# Altium PCB PCB_L298n.PcbDoc
Units mm, origin at the board's own origin, x right, y up, seen from the top; angles counter-clockwise.
Board outline 45.09 x 46.1 mm, 2 copper layers (Top Layer, Bottom Layer), stack 1.57 mm thick; 21 components, 16 nets, 64 pads, 0 vias.
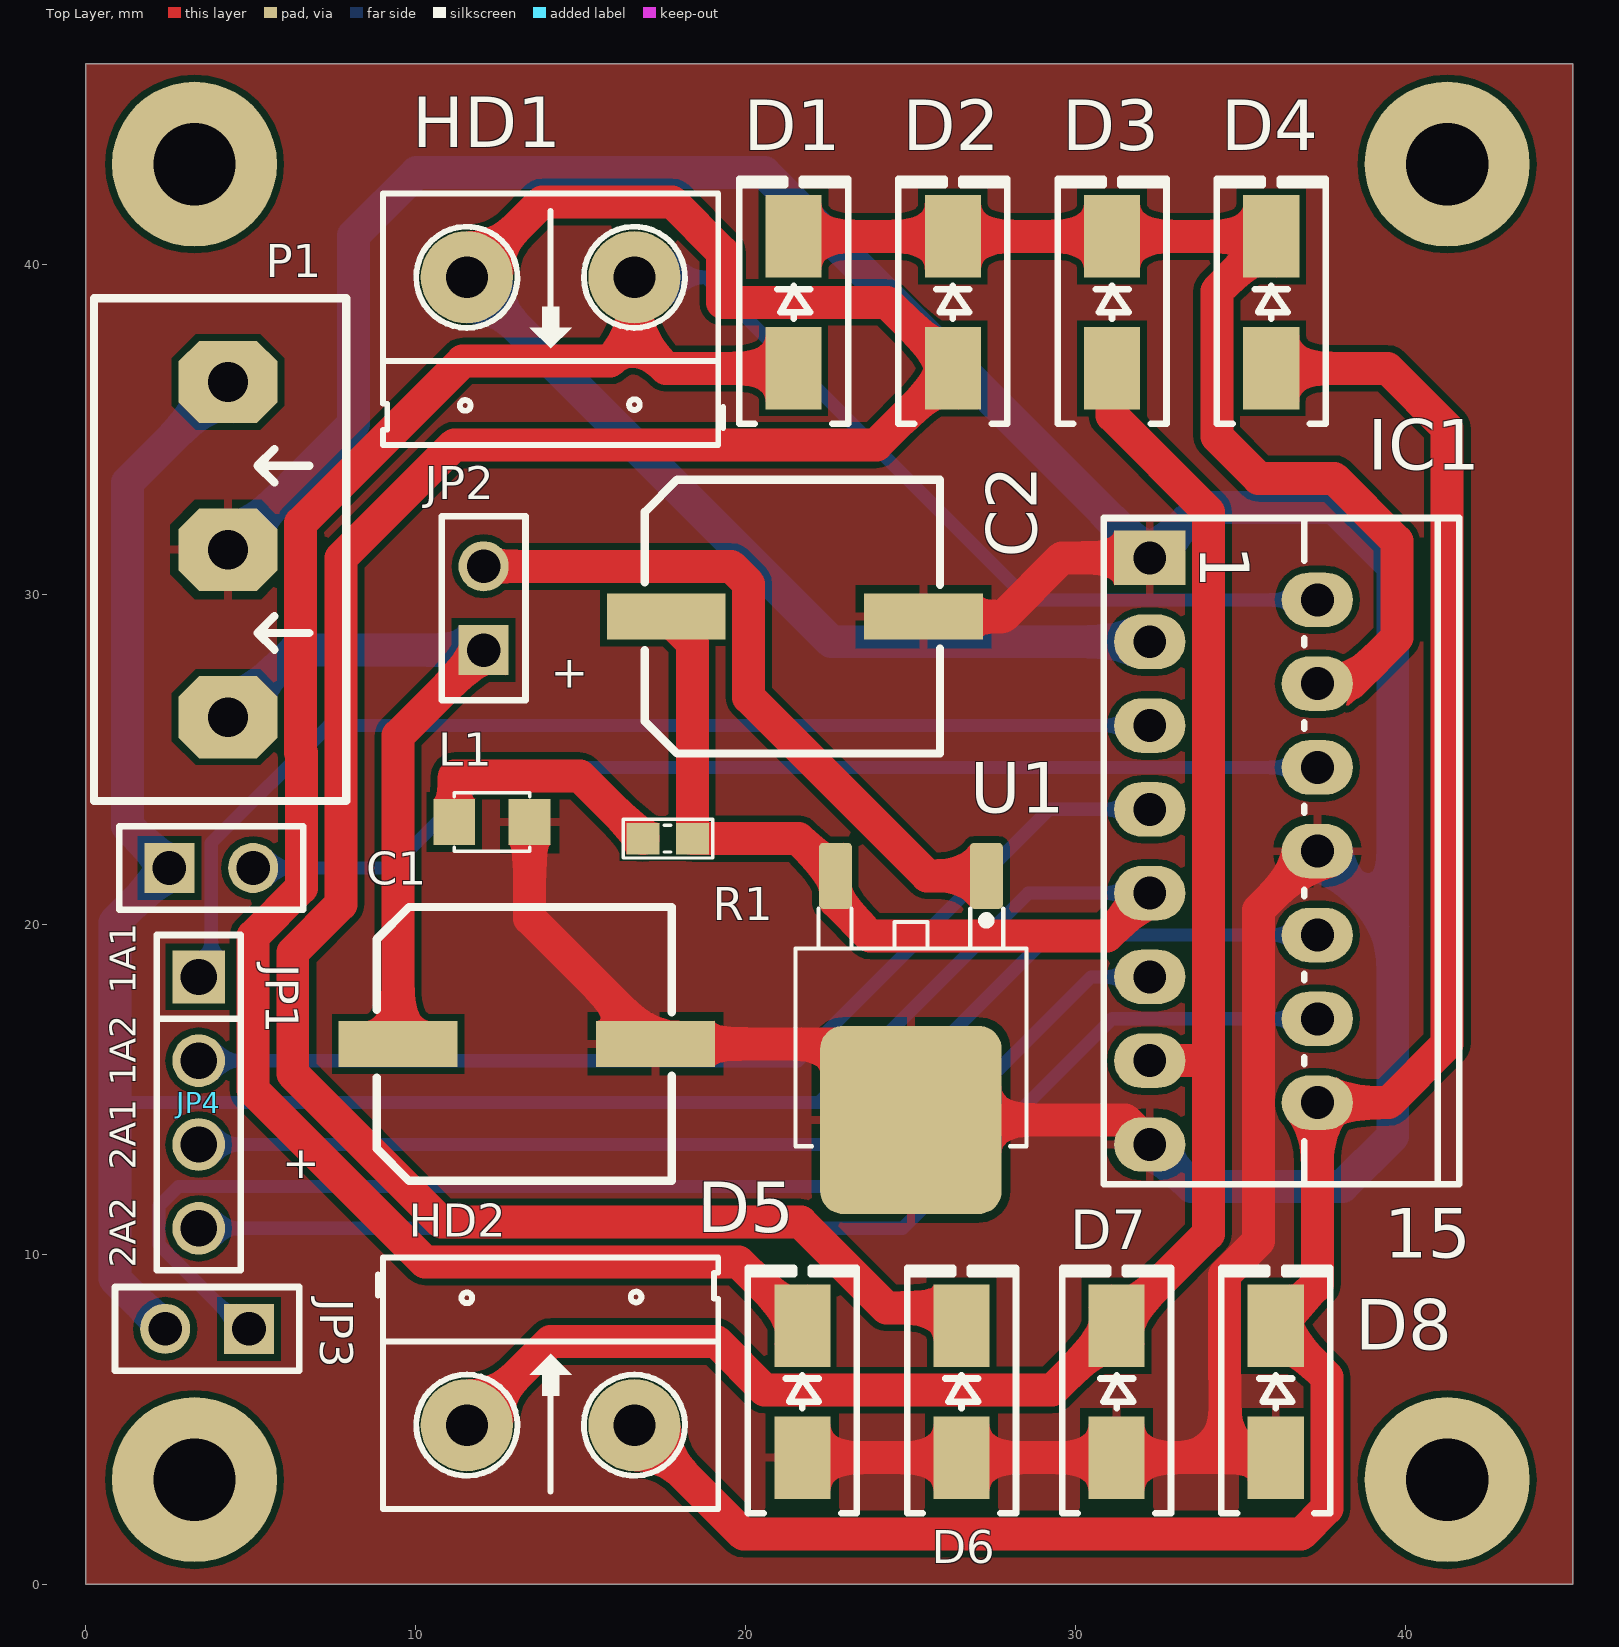
[diagram p0: Top Layer view]
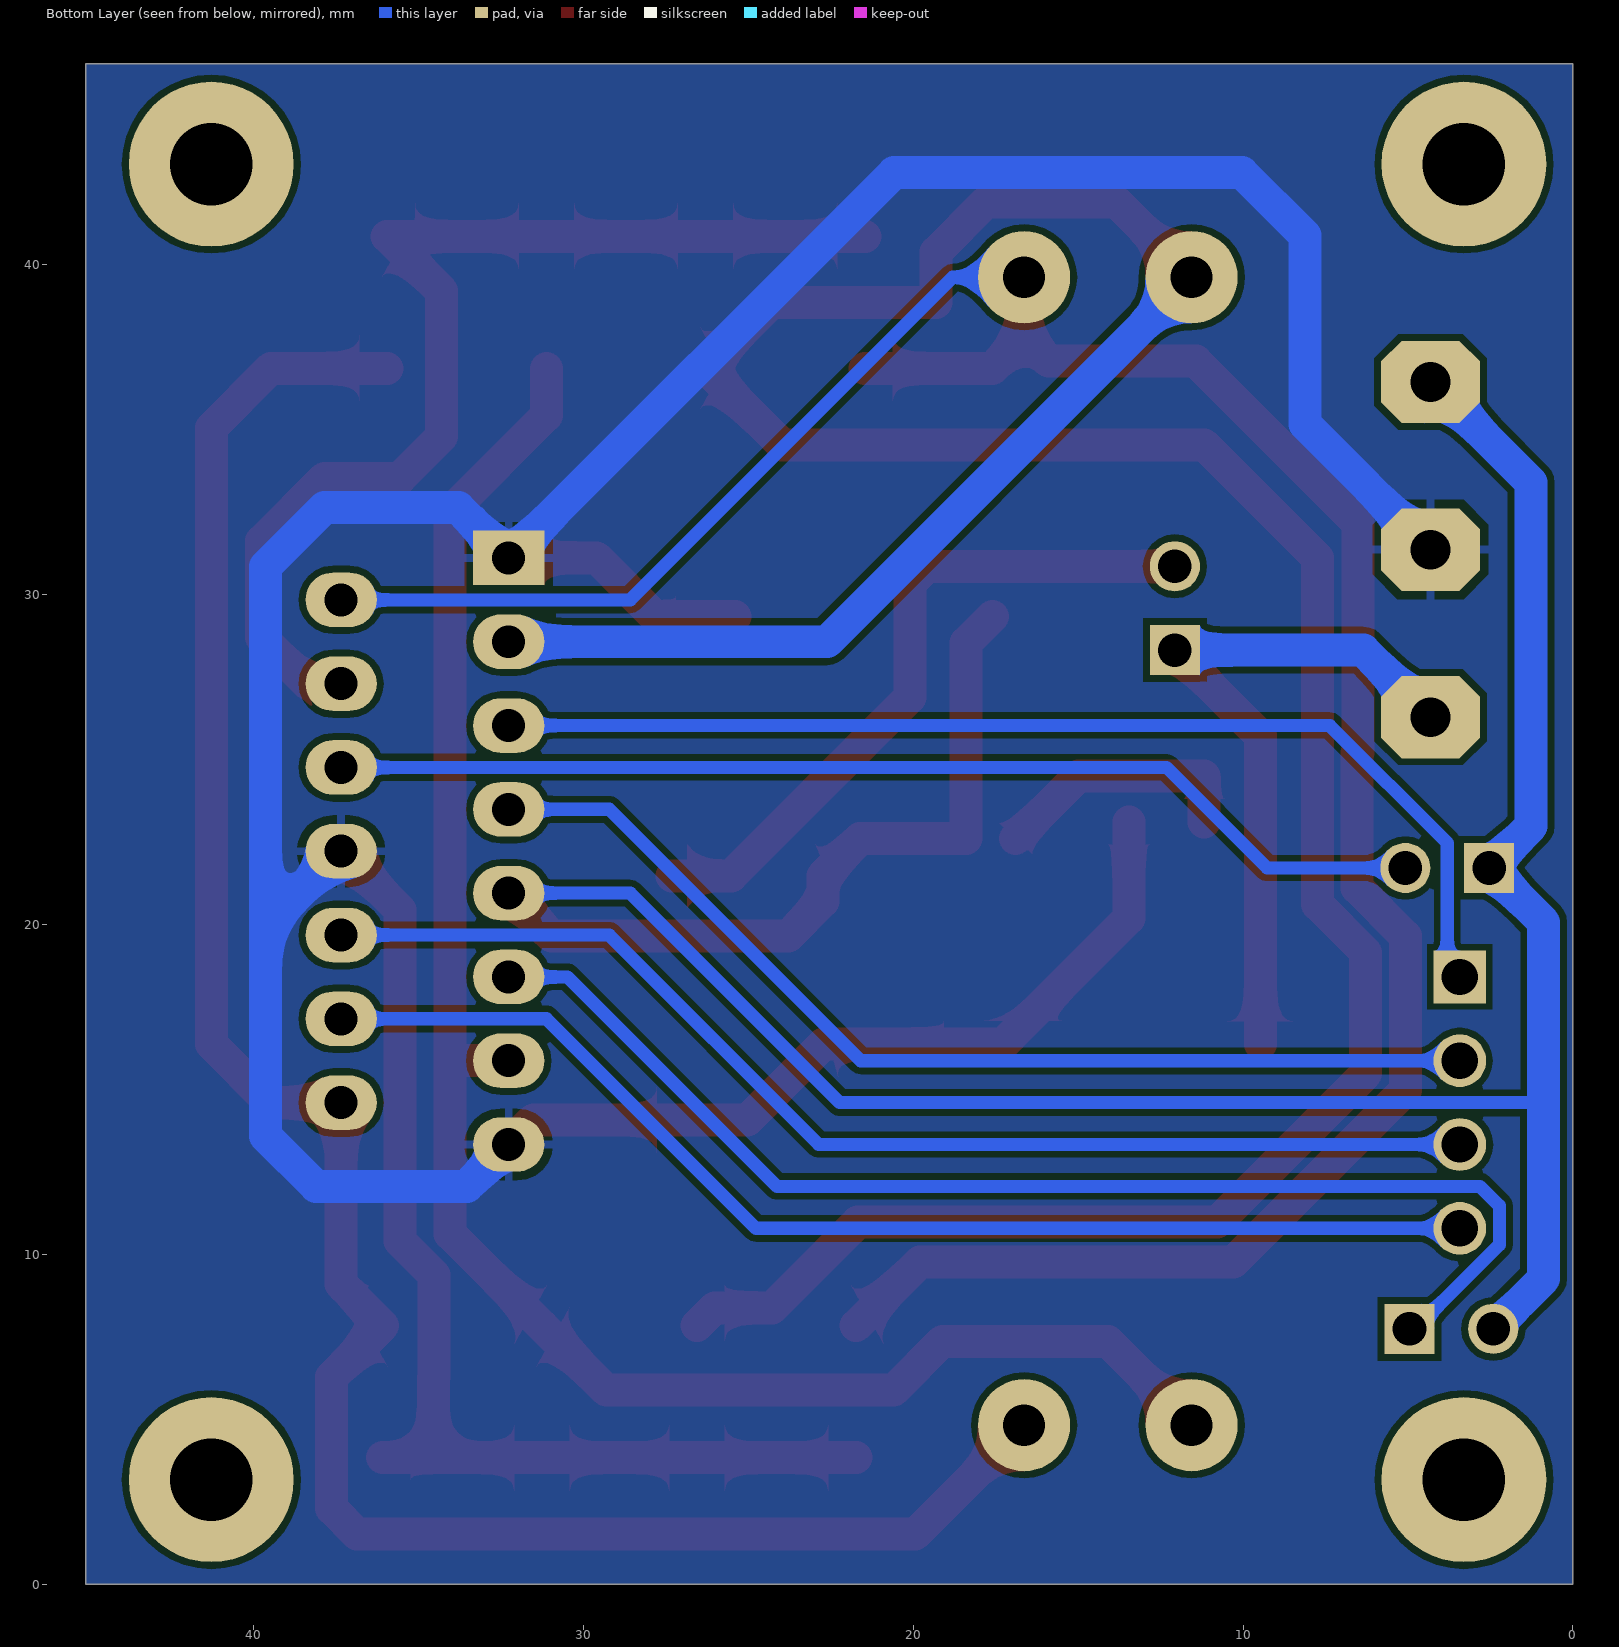
[diagram p1: Bottom Layer view, seen from below]
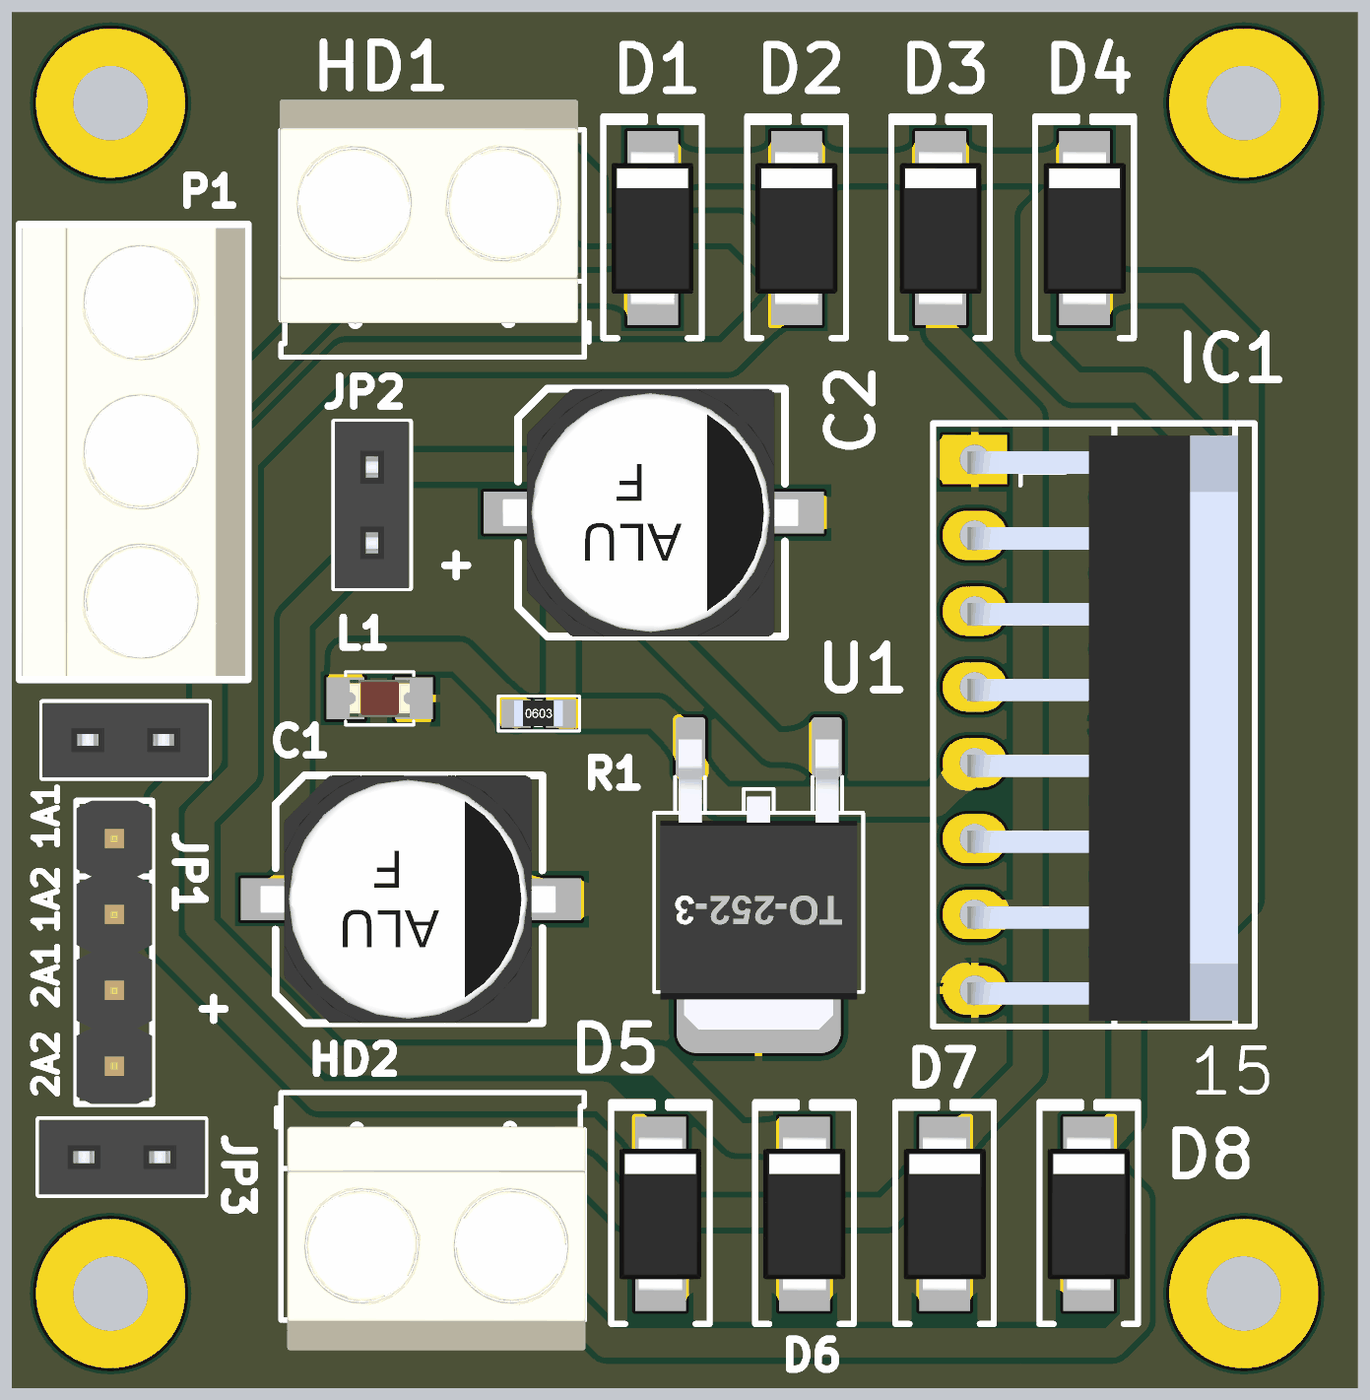
[diagram p2: 3D render of the assembled board from above, using the file's embedded part models]

## Layer stack, top to bottom
Top Solder: solder mask 0.01, Solder Resist, Dk 3.5
Top Layer: signal copper 0.035
Dielectric 1: dielectric 1.5, FR-4, Dk 4.8
Bottom Layer: signal copper 0.035
Bottom Solder: solder mask 0.01, Solder Resist, Dk 3.5

## Board outline
0,0 45.085,0 45.085,46.101 0,46.101

## Design rules (kind name [scope] priority, off if disabled: settings)
Clearance [All] p1: gap=0.2 ignorepadtopadclearanceinfootprint=FALSE
PolygonConnect [All] p1: connectstyle=Relief reliefconductorwidth=0.254 reliefentries=4 polygonreliefangle="90 Angle" airgapwidth=0.254
RoutingVias [All] p1: holewidth=0.3 width=0.6 viastyle="Through Hole" minholewidth=0.2 minwidth=0.4 maxholewidth=0.4 maxwidth=1
SolderMaskExpansion [All] p1: expansion=0.102
Width [All] p1: maxlimit=1 minlimit=0.2 preferedwidth=0.4
30 further rules are at their usual default settings.

## Components (designator, comment, footprint, x,y, rotation, side; value= is the part's Value field where it differs from the comment)
C1 "220uF/35V" CAP_ALUM_SMD_80102_TYPE_F 13.272,16.383 r0 top
C2 "220uF/35V" CAP_ALUM_SMD_80102_TYPE_F 21.4,29.337 r0 top
D1 "M7" "DIODE SMA" 21.463,38.862 r90 top
D2 "M7" "DIODE SMA" 26.289,38.862 r90 top
D3 "M7" "DIODE SMA" 31.115,38.862 r90 top
D4 "M7" "DIODE SMA" 35.941,38.862 r90 top
D5 "M7" "DIODE SMA" 21.727,5.842 r90 top
D6 "M7" "DIODE SMA" 26.553,5.842 r90 top
D7 "M7" "DIODE SMA" 31.252,5.842 r90 top
D8 "M7" "DIODE SMA" 36.078,5.842 r90 top
HD1 "Header 2" HED2 16.637,39.624 r180 top
HD2 "Header 2" HED2 11.557,4.826 r0 top
IC1 "L298" DIP15SL2 34.798,22.225 r270 top
JP1 "JP 1x2 2.54" "JP 1x2 CT" 2.54,21.717 r0 top
JP2 "JP 1x2 2.54" "JP 1x2 CT" 12.065,28.321 r90 top
JP3 "JP 1x2 2.54" "JP 1x2 CT" 4.953,7.747 r180 top
JP4 "JP 1x4 2.54" "JP 1x4 DT" 3.429,18.415 r270 top
L1 "LED 0805" LED-0805-Red 11.176,23.114 r0 top
P1 "Header 3 - M" "Medium - Header 3" 4.318,26.289 r90 top
R1 "1k" "tro smd 0603" 17.641,22.606 r0 top
U1 "78M05 SMD TO252" TO252 25.019,17.78 r180 top

## Footprints (in the part's own frame and the unit in brackets; to place one, negate y for a bottom-side part, rotate by r counter-clockwise, add the part's x,y. Pads: shape width x height; smd on the part's side, far side on the other; paste and mask are expansions set on the pad)
CAP_ALUM_SMD_80102_TYPE_F [mm]
  rect 3.6x1.4 smd: 1(-3.8,0) 2(4,0)
  silkscreen extent -4.44,-4.15 4.5,4.15, body extent -4.95,-4.15 4.95,4.15, height 10.2
"DIODE SMA" [mm] "SMA"
  rect 2.5x1.7 smd: 1(-2,0) 2(2,0)
  silkscreen extent -3.68,-1.65 3.75,1.65, body extent -2.6,-1.37 2.6,1.37, height 2.4
DIP15SL2 [mil]
  rect 65x85 hole 39.37: 1(-350,-100)
  oval 65x85 hole 39.37: 2(-300,100) 3(-250,-100) 4(-200,100) 5(-150,-100) 6(-100,100) 7(-50,-100) 8(0,100) 9(50,-100) 10(100,100) 11(150,-100) 12(200,100) 13(250,-100) 14(300,100) 15(350,-100)
  silkscreen extent -398,-155 398,269, body extent -382,-110 390,247, height 895
HED2 [mil] "Header 2, 2 pin, hight 300mil, Pin to Pin 200, Colour Green"
  round 110 hole 50: 1(0,0) 2(200,0)
  silkscreen extent -106,-100 300,200, body extent -92,-140 302,155, height 394
"JP 1x2 CT" [mm] "JP 1x2 CT"
  rect 1.52x1.52 hole 1.02: 1(0,0)
  round 1.52 hole 1.02: 2(2.54,0)
  silkscreen extent -1.52,-1.27 4.06,1.27, body extent -1.52,-1.25 4.06,1.25, height 8.51
"JP 1x4 DT" [mm] "4 pins, 1 row, straight, gold plating"
  rect 1.6x1.6 hole 1.1: 1(0,0)
  round 1.6 hole 1.1: 2(2.54,0) 3(5.08,0) 4(7.62,0)
  silkscreen extent -1.27,-1.27 8.89,1.27, body extent -1.27,-1.27 8.89,1.27, height 8.54
LED-0805-Red [mil]
  rect 50x55 smd: 1(0,0) 2(90,0)
  silkscreen extent 0,-35 90,35, body extent 5,-25 85,25, height 43
"Medium - Header 3" [mm]
  oct 2.5x3 hole 1.2: 1(0,0) 2(5.08,0) 3(10.16,0)
  silkscreen extent -2.54,-3.58 12.7,4.06, body extent -2.42,-3.51 12.58,3.99, height 10
TO252 [mm] "TO252"
  round 0.5 on Mech15: 0(0,0)
  rrect25% 1x2 smd: 1(-2.285,-3.7) 3(2.285,-3.7)
  rrect25% 5.5x5.7 smd: 2(0,3.7)
  silkscreen extent -3.5,-2.7 3.5,4.5, body extent -3.3,-3.95 3.3,5.76, height 2.31
"tro smd 0603" [mm] "Chip Capacitor, 2-Leads, Body 1,60x0,80mm, IPC Medium Density"
  rect 1x0.95 smd mask+0.076: 1(-0.75,0) 2(0.75,0)
  silkscreen extent -1.35,-0.58 1.37,0.58, body extent -0.82,-0.42 0.82,0.43, height 0.44

## Part data
C1 C2: library part EEE-FK1V221P, "CAP ALUM 220uF 20% 35V SMD", MFR=Panasonic, Category=CAPACITOR, MPN=EEE-FK1V221P, PinCount=2, Solder=SMT
D1 D2 D3 D4 D5 D6 D7 D8: library part "Diode M7 ( 4007 )", "Dán", Chung_Loai=Dán, Don_Vi=Con, Ma_Hang=MH000944, Ten_Linh_Kien="Diode M7 1N4007 SMD 1A 1000V"
HD1 HD2: library part Hed2, "Header 2 (Green)"
IC1: "Dual Full-H Driver", ComponentLink1Description="Manufacturer Link", ComponentLink1URL=http://www.ti.com/, DatasheetVersion=Jun-1990, Note="The tab is elec is connected to GND pin", PackageDescription="TO, Thru-Hole, Vertical, Heatsink Mounted; 15 Bent Staggered Leads; Pitch 1.27 mm", PackageReference=KV015, Published=15-May-2002, Publisher="Altium Limited"
JP1 JP2 JP3: library part "JP 1x2 2.54 Cai Thang", "C?m", Chung_Loai=C?m, Don_Vi=Con, Ma_Hang=MH004006, Ten_Linh_Kien="Jump Ðon Cái 2.54MM 1x20P Th?ng"
JP4: library part "JP 1x4 2.54 Duc Thang", "C?m", Chung_Loai=C?m, Don_Vi=Con, Ma_Hang=MH000903, Ten_Linh_Kien="Jump Ðon Ð?c 2.54MM 1x40P Th?ng 11MM"
L1: library part "LED 0805 Do", "Dán", Chung_Loai=Dán, Don_Vi=Con, Ma_Hang=MH000897, Ten_Linh_Kien="LED 0805 Màu Ð? (Red)"
P1: "Header, 3-Pin, Medium", LatestRevisionDate=17-Jul-2002, LatestRevisionNote="Re-released for DXP Platform.", Publisher="Altium Limited"
R1: library part "Tro 0603 5% 1k", "Dán", Chung_Loai=Dán, Don_Vi=Con, Ma_Hang=MH006319, So_Chan=2, Ten_Linh_Kien="Tr? 0603 5% 1k"
U1: "Dán", Chung_Loai=Dán, Don_Vi=Con, Ma_Hang=MH001917, Ten_Linh_Kien="78M05 TO252"

## Free pads (board coordinates)
  round 5 hole 2.5: 11(3.302,43.053) 12(41.275,43.053) 13(3.302,3.175) 14(41.275,3.175)

## Nets (pads, with @x,y where several pads share a name; then routed paths per layer and width w, separated by ;. In a path a pad name is that pad's centre, name@x,y a point inside that pad or via, vN(x,y) a via of type N, cw(c..) or ccw(c..) an arc to the next point about the centre after c; other vN are vias at no path point)
GND: C1.2 C2.2 D5.1 D6.1 D7.1 D8.1 IC1.1 IC1.8 IC1.15 L1.2 P1.2 U1.2 | length 144.7
  Top Layer w1: L1.2 13.462,20.193 C1.2 22.716,16.383 U1.2 31.513,14.08 IC1.15 ; D5.1 D6.1 D7.1 34.544,3.842 ; C2.2 27.813,29.337 29.591,31.115 IC1.1 ; D8.1 34.544,3.842 ; IC1.8 35.558,20.445 35.558,19.053 35.56,19.052 35.56,17.778 35.558,17.777 35.558,16.513 35.56,16.512 35.56,15.238 35.558,15.237 35.558,13.973 35.56,13.972 35.56,10.414 34.528,9.382 34.528,6.286 34.544,6.27 34.544,3.842
  Bottom Layer w1: P1.2 8.128,35.179 8.128,40.894 10.033,42.799 20.574,42.799 IC1.1 33.782,32.639 37.846,32.639 39.624,30.861 39.624,19.939 ; IC1.15 33.528,12.065 38.1,12.065 39.624,13.589 39.624,19.939 ; IC1.8 39.624,19.939
NetC1_1: C1.1 JP2.1 P1.1 | length 21.6
  Top Layer w1: C1.1 9.472,25.728 JP2.1
  Bottom Layer w1: P1.1 6.35,28.321 JP2.1
NetC2_1: C2.1 IC1.9 JP1.1 JP3.2 P1.3 R1.2 U1.3 | length 89
  Top Layer w1: C2.1 18.391,28.546 R1.2 21.608,22.606 U1.3 22.734,20.702 23.784,19.652 30.955,19.652 IC1.9
  Bottom Layer w0.4: 0.889,14.732 1.016,14.605 22.225,14.605 28.575,20.955 IC1.9
  Bottom Layer w1: JP3.2 0.889,9.271 0.889,14.732 0.889,20.066 JP1.1 1.27,22.987 1.27,33.401 P1.3
NetD1_1: D1.1 D5.2 HD1.1 IC1.2 | length 81.6
  Top Layer w1: HD1.1 16.637,37.825 ; D1.1 17.6,36.862 16.637,37.825 ; D5.2 19.79,9.779 10.287,9.779 5.08,14.986 5.08,19.652 6.54,21.112 6.54,25.198 6.518,25.22 6.518,32.172 11.43,37.084 15.896,37.084 16.637,37.825
  Bottom Layer w0.4: HD1.1 18.796,39.624 28.575,29.845 IC1.2
NetD1_2: D1.2 D2.2 D3.2 D4.2 IC1.4 | length 33.9
  Top Layer w1: D1.2 D2.2 D3.2 D4.2 34.29,39.211 34.29,34.798 35.56,33.528 37.846,33.528 39.751,31.623 39.751,28.702 38.354,27.305 IC1.4
NetD2_1: D2.1 D6.2 HD1.2 IC1.3 | length 105
  Top Layer w1: HD1.2 13.843,41.91 17.78,41.91 19.304,40.386 19.304,38.862 24.289,38.862 D2.1 23.971,34.544 11.176,34.544 7.74,31.108 7.74,20.615 6.28,19.155 6.28,15.483 10.784,10.979 21.68,10.979 24.277,8.382 26.013,8.382 D6.2 ; IC1.3 IC1.3@32.766,28.575
  Bottom Layer w1: HD1.2 22.606,28.575 IC1.3
NetD3_1: D3.1 D7.2 HD2.1 IC1.13 | length 55.4
  Top Layer w1: HD2.1 14.097,7.366 19.113,7.366 20.587,5.892 29.302,5.892 D7.2 34.038,10.628 34.038,16.129 ; D3.1 31.115,35.433 34.038,32.51 34.038,16.129 ; IC1.13 33.784,15.875 34.038,16.129
NetD4_1: D4.1 D8.2 HD2.2 IC1.14 | length 65.6
  Top Layer w1: HD2.2 19.939,1.524 36.85,1.524 37.628,2.302 37.628,6.292 D8.2 37.338,9.102 IC1.14 39.497,14.605 41.275,16.383 41.275,35.052 39.465,36.862 D4.1
NetIC1_5: IC1.5 JP4.1 | length 34.1
  Bottom Layer w0.4: JP4.1 3.81,18.796 3.81,22.479 7.366,26.035 IC1.5
NetIC1_6: IC1.6 JP1.2 | length 33.5
  Bottom Layer w0.4: JP1.2 9.271,21.717 12.319,24.765 IC1.6
NetIC1_7: IC1.7 JP4.2 | length 32
  Bottom Layer w0.4: JP4.2 21.59,15.875 29.21,23.495 IC1.7
NetIC1_10: IC1.10 JP4.3 | length 36.5
  Bottom Layer w0.4: JP4.3 22.86,13.335 29.21,19.685 IC1.10
NetIC1_11: IC1.11 JP3.1 | length 37.9
  Bottom Layer w0.4: JP3.1 4.78,7.747 2.229,10.298 2.229,11.476 2.818,12.065 24.13,12.065 30.48,18.415 IC1.11
NetIC1_12: IC1.12 JP4.4 | length 36.5
  Bottom Layer w0.4: JP4.4 24.765,10.795 31.115,17.145 IC1.12
NetJP2_2: JP2.2 U1.1 | length 21.1
  Top Layer w1: JP2.2 19.566,30.861 20.1,30.327 20.1,26.89 25.51,21.48 U1.1
NetL1_1: L1.1 R1.1 | length 7.9
  Top Layer w1: L1.1 11.176,24.513 14.984,24.513 R1.1
pads on no net: U1.0

## Polygon pours and split planes (outlines as drawn)
GND on Top Layer "Top Layer-No Net1" (solid, pour order 12): 0,0 45.085,0 45.085,46.101 0,46.101
no net on Top Layer "Top Layer-No Net 1" (solid, remove dead copper, pour order 10): 0,46.101 45.085,46.101 45.085,0 0,0
no net on Top Layer "Top Layer-No Net" (solid, remove dead copper, pour order 2): 1061.593,10.668
GND on Bottom Layer "Bottom Layer-No Net1" (solid, pour order 9): 0,0 45.085,0 45.085,46.101 0,46.101
GND on Bottom Layer "Bottom Layer-No Net1" (solid, remove dead copper, pour order 8): 0,0 45.085,0 45.085,46.101 0,46.101

## Silkscreen, mask and mechanical layers (free items; w line width, h text height)
Top Overlay:
  text "1A1" at 1.524,17.907 h0.8 r90
  text "1A2" at 1.524,15.113 h0.8 r90
  text "2A1" at 1.524,12.573 h0.8 r90
  text "2A2" at 1.524,9.592 h0.8 r90

## Text inside footprints (layer, text, board x,y; h text height)
C1: Top Overlay "+" at 5.969,12.319 h1
C2: Top Overlay "+" at 14.097,27.178 h1
IC1: Top Overlay "15" at 39.37,9.906 h1.5; Top Overlay "1" at 33.782,31.496 h1.5 r270